# Altium PCB DanSquidControlAdapterBoard.PcbDoc
Units mil, origin at the board's own origin, x right, y up, seen from the top; angles counter-clockwise.
Board outline 2720 x 6900 mil, 4 copper layers (Top Layer, Mid-Layer 1, Mid-Layer 2, Bottom Layer), stack 56.6 mil thick; 16 components, 37 nets, 765 pads, 0 vias.
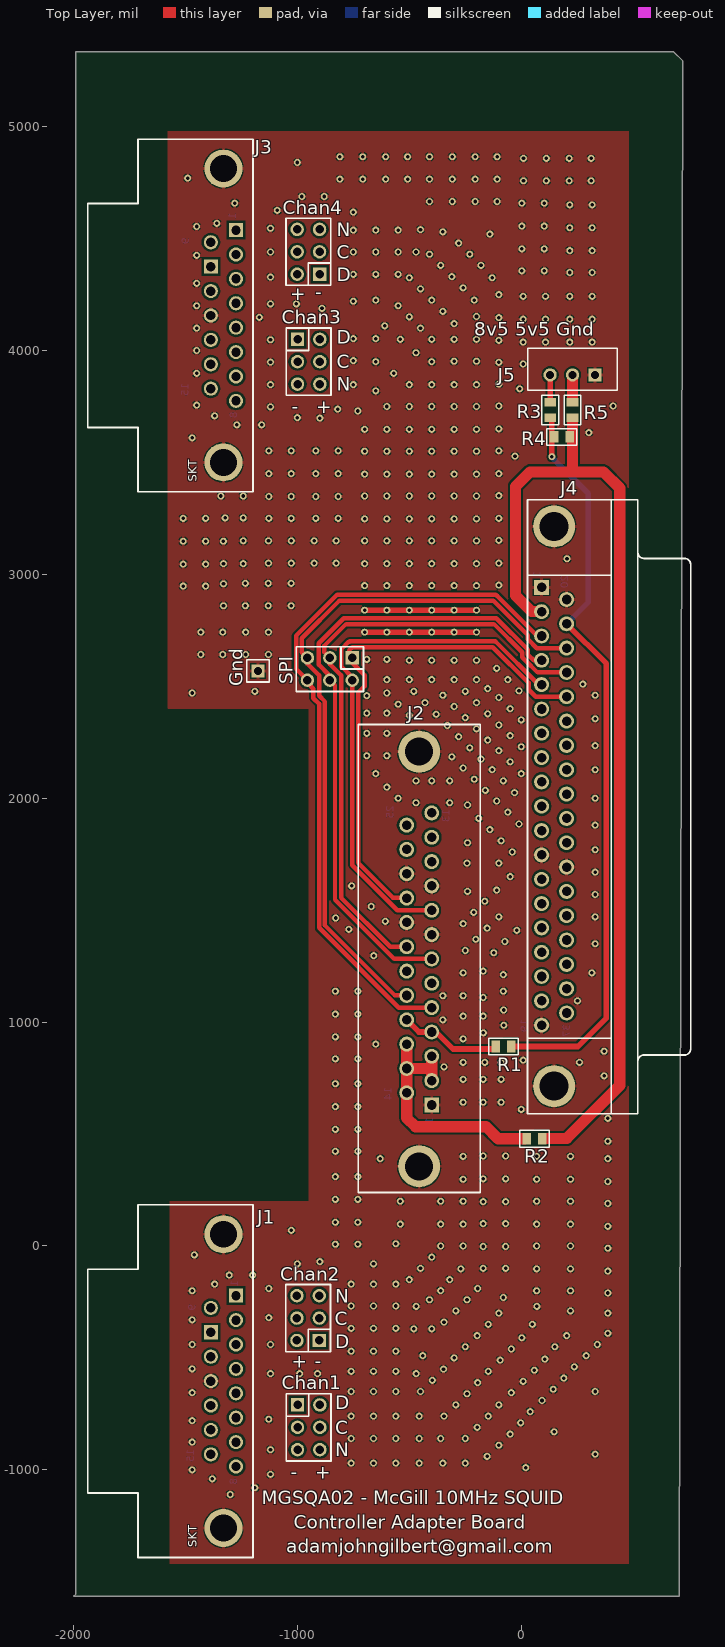
[diagram p0: Top Layer view]
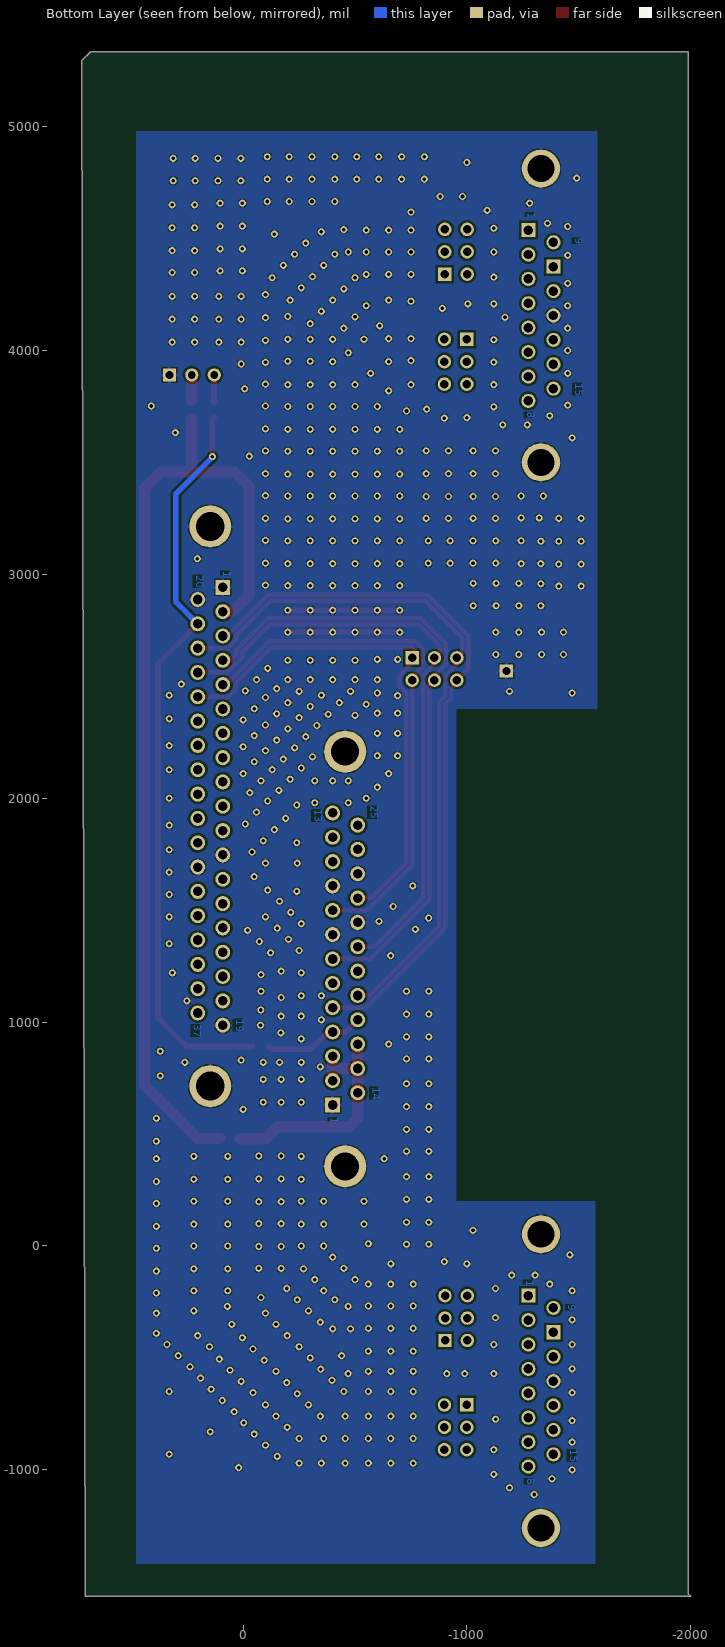
[diagram p1: Bottom Layer view, seen from below]
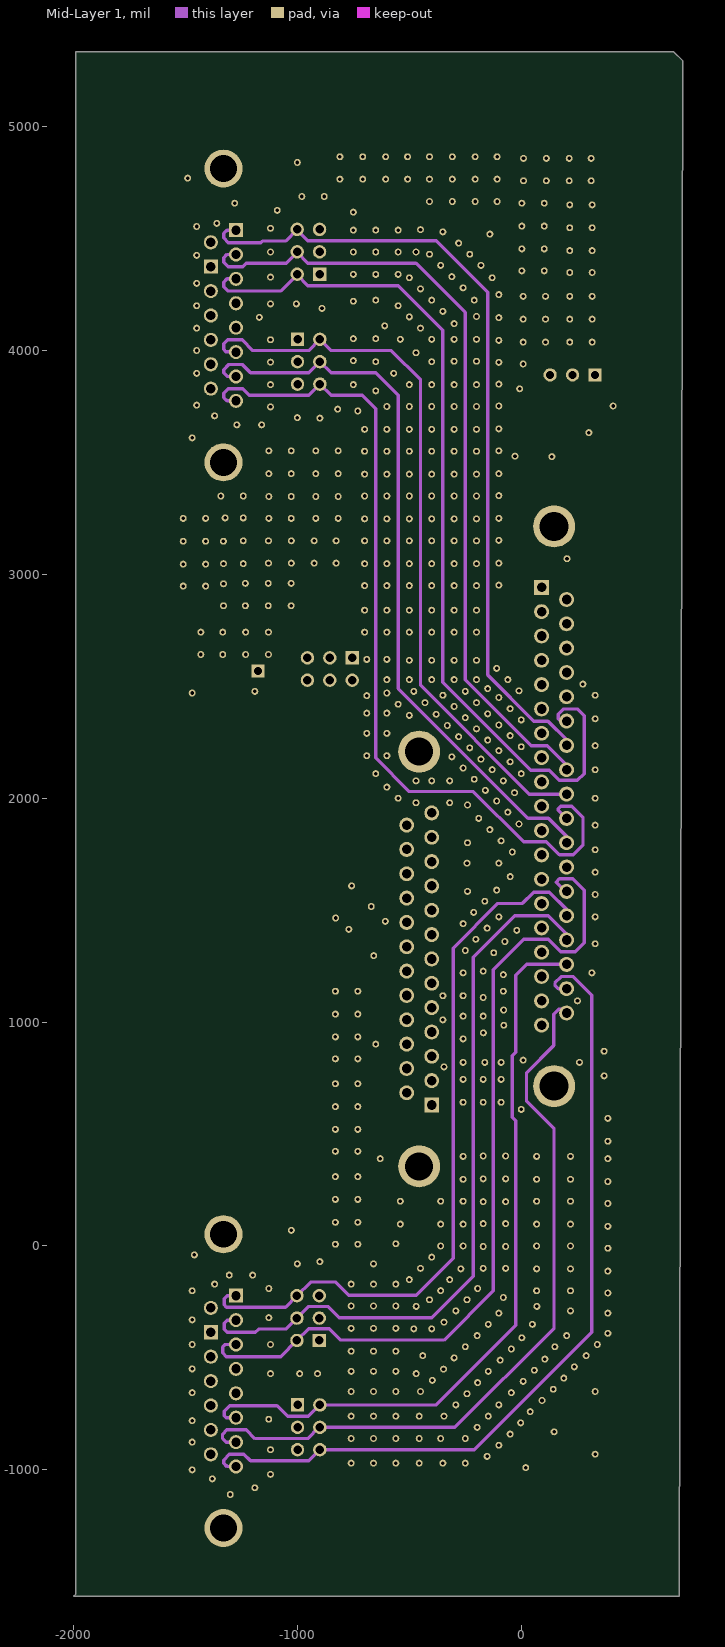
[diagram p2: Mid-Layer 1]
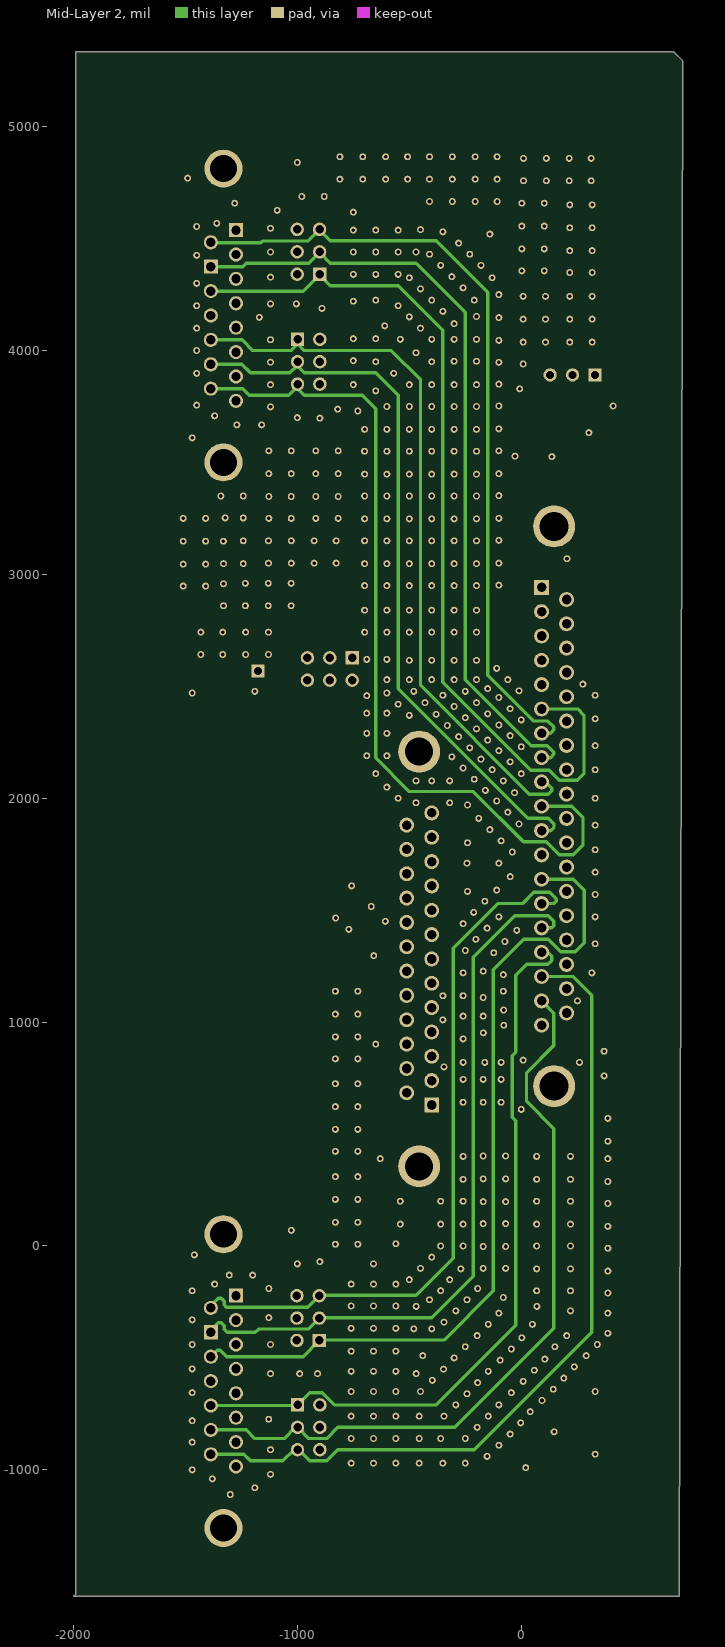
[diagram p3: Mid-Layer 2]

## Layer stack, top to bottom
Top Layer: signal copper 1.4
Dielectric: core 12, FR-4, Dk 4.8
Mid-Layer 1: signal copper 1.4
Dielectric: prepreg 27, FR-4, Dk 4.8
Mid-Layer 2: signal copper 1.4
Dielectric: core 12, FR-4, Dk 4.8
Bottom Layer: signal copper 1.4

## Board outline
705.59,-1565 -1999.41,-1565 -1989.41,-1555 -1989.41,5335 680.59,5335 720.59,5295

## Design rules (kind name [scope] priority, off if disabled: settings)
Clearance Clearance_BotText [(IsText AND OnLayer('Bottom Layer')) vs IsRegion] p1: gap=1
Clearance Clearance_0805 [HasFootprint('0805') vs IsRegion] p2: gap=15
Clearance ClearanceRegion [IsRegion] p3: gap=10
Clearance [All] p4: gap=6
DiffPairsRouting [All] p1: maxlimit=10 minlimit=6 mostfreqgap=10 toplayer_maxgap=6 toplayer_prefgap=6 midlayer1_mingap=10 midlayer2_mingap=10 bottomlayer_maxgap=6 bottomlayer_prefgap=6 maxuncoupledlength=500
HoleSize [All] p1: absolutevalues=TRUE maxlimit=200 minlimit=1 maxpercent=80.000 minpercent=20.000
PlaneClearance PlaneClearance_1 [HasFootprint('0805')] p1: clearance=30
PlaneClearance [All] p2: clearance=20
PolygonConnect [All] p1: connectstyle=Relief reliefconductorwidth=15 reliefentries=4 polygonreliefangle="90 Angle" airgapwidth=5
RoutingVias [All] p1: holewidth=28 width=50 viastyle="Through Hole" minholewidth=16 minwidth=31 maxholewidth=16 maxwidth=31
SilkToSilkClearance [All] p1: silktosilkclearance=0
SilkToSolderMaskClearance SilkscreenOverComponentPads [IsPad] p1: minsilkscreentomaskgap=0 clearancetoexposedcopper=TRUE
SolderMaskExpansion [All] p1: expansion=4
Width [All] p1: maxlimit=100 minlimit=15 preferedwidth=15
23 further rules are at their usual default settings.

## Classes and differential pairs
differential pair REG_SCLK: +REG_SCLK_P -REG_SCLK_N
differential pair NULLER4: +NULLER4_P -NULLER4_N
differential pair NULLER3: +NULLER3_P -NULLER3_N
differential pair NULLER2: +NULLER2_P -NULLER2_N
differential pair NULLER1: +NULLER1_P -NULLER1_N
differential pair MOSI: +MOSI_P -MOSI_N
differential pair DEV_SCLK_MISO: +DEV_SCLK_MISO_P -DEV_SCLK_MISO_N
differential pair DEMOD4: +DEMOD4_P -DEMOD4_N
differential pair DEMOD3: +DEMOD3_P -DEMOD3_N
differential pair DEMOD2: +DEMOD2_P -DEMOD2_N
differential pair DEMOD1: +DEMOD1_P -DEMOD1_N
differential pair CARRIER4: +CARRIER4_P -CARRIER4_N
differential pair CARRIER3: +CARRIER3_P -CARRIER3_N
differential pair CARRIER2: +CARRIER2_P -CARRIER2_N
differential pair CARRIER1: +CARRIER1_P -CARRIER1_N

## Components (designator, comment, footprint, x,y, rotation, side; value= is the part's Value field where it differs from the comment)
Chan1 "Header 2x3pin 0.1\"" HDR2X3 -999.41,-710 r270 top
Chan2 "Header 2x3pin 0.1\"" HDR2X3 -902,-422 r90 top
Chan3 "Header 2x3pin 0.1\"" HDR2X3 -999.41,4050 r270 top
Chan4 "Header 2x3pin 0.1\"" HDR2X3 -901,4341 r90 top
Gnd "Header1" HDR1 -1176,2569 r180 top (schematic designator GND)
J1 "DB15M" DSUB15-M -1274.41,-985 r90 top
J2 "DB25F" "DSUB25-F - Vertical" -400,630 r90 top
J3 "DB15M" DSUB15-M -1274.41,3775 r90 top
J4 "DB37F" DSUB37-F 520.59,2290 r270 top
J5 "WM2889" HDR1X3_MolexVertical 329,3891 r180 top
R1 "0, 0805" 0805 -44,891 r180 top
R2 "0, 0805" 0805 94,479 r180 top
R3 "0, 0805" 0805 130,3769 r270 top
R4 "DNL" 0805 216,3614 r180 top
R5 "0, 0805" 0805 229,3769 r270 top
SPI "Header 2x3pin 0.1\"" HDR2X3 -755,2627.18 r180 top

## Footprints (in the part's own frame and the unit in brackets; to place one, negate y for a bottom-side part, rotate by r counter-clockwise, add the part's x,y. Pads: shape width x height; smd on the part's side, far side on the other; paste and mask are expansions set on the pad)
0805 [mil]
  rect 38.5x52 smd: 1(0,0) 2(70,0)
  silkscreen extent -31,-38 101,38
DSUB15-M [mil]
  rect 63x63 hole 42: 1(763,0) 10(599.5,112)
  round 63 hole 42: 2(654,0) 3(545,0) 4(436,0) 5(327,0) 6(218,0) 7(109,0) 8(0,0) 9(708.5,112) 11(490.5,112) 12(381.5,112) 13(272.5,112) 14(163.5,112) 15(54.5,112)
  round 170 hole 120: 16(-274.5,56) 17(1037.5,56)
  silkscreen extent -406,-76 1169,662
"DSUB25-F - Vertical" [mm] "6225FE-ND"
  rect 1.69x1.69 hole 1.09: 1(0,0)
  round 1.69 hole 1.09: 2(2.761,0) 3(5.522,0) 4(8.283,0) 5(11.044,0) 6(13.805,0) 7(16.566,0) 8(19.327,0) 9(22.088,0) 10(24.849,0) 11(27.61,0) 12(30.371,0) 13(33.132,0) 14(1.38,2.84) 15(4.141,2.84) 16(6.903,2.84) 17(9.663,2.84) 18(12.424,2.84) 19(15.185,2.84) 20(17.946,2.84) 21(20.708,2.84) 22(23.468,2.84) 23(26.229,2.84) 24(28.99,2.84) 25(31.751,2.84)
  round 4.76 hole 3.175: 26(-6.96,1.42) 27(40.092,1.42)
  silkscreen extent -9.93,-5.5 43.17,8.33
DSUB37-F [mm] "DSUB 37Pin Female"
  rect 1.69x1.69 hole 1.09: 1(-16.566,-10.92)
  round 1.69 hole 1.09: 2(-13.806,-10.92) 3(-11.046,-10.92) 4(-8.286,-10.92) 5(-5.526,-10.92) 6(-2.766,-10.92) 7(-0.006,-10.92) 8(2.754,-10.92) 9(5.514,-10.92) 10(8.274,-10.92) 11(11.034,-10.92) 12(13.794,-10.92) 13(16.554,-10.92) 14(19.314,-10.92) 15(22.074,-10.92) 16(24.834,-10.92) 17(27.594,-10.92) 18(30.354,-10.92) 19(33.114,-10.92) 20(-15.187,-8.08) 21(-12.427,-8.08) 22(-9.667,-8.08) 23(-6.907,-8.08) 24(-4.147,-8.08) 25(-1.387,-8.08) 26(1.373,-8.08) 27(4.133,-8.08) 28(6.893,-8.08) 29(9.653,-8.08) 30(12.413,-8.08) 31(15.173,-8.08) 32(17.933,-8.08) 33(20.693,-8.08) 34(23.453,-8.08) 35(26.213,-8.08) 36(28.973,-8.08) 37(31.733,-8.08)
  round 4.76 hole 3.26: 38(-23.476,-9.5) 39(40.024,-9.5)
  silkscreen extent -26.5,-12.5 43.15,6
HDR1 [mm]
  rect 1.5x1.5 hole 0.889: 1(0,0)
  silkscreen extent -1.27,-1.27 1.27,1.27
HDR1X3_MolexVertical [mm] "WM2889"
  rect 1.5x1.5 hole 0.889: 1(0,0)
  round 1.5 hole 0.889: 2(2.54,0) 3(5.08,0)
  silkscreen extent -2.54,-3.02 7.62,1.73
HDR2X3 [mil]
  rect 60x60 hole 38: 1(0,0)
  round 60 hole 38: 2(0,100) 3(100,0) 4(100,100) 5(200,0) 6(200,100)
  silkscreen extent -50,-50 250,150

## Part data
Chan1 Chan2 Chan3 Chan4 SPI: library part Header2x3
Gnd: "TestPoint1"
J5: library part "Header 3", "Header, 0.1\"  3-Pin straight (Any equivalent - may need to be value added)"
R1 R2 R3 R4 R5: library part "RES 0805", "RES 0.0 OHM 1/8W 0805 SMD"

## Free pads (board coordinates)
  round 31 hole 16: 5(-1510,2947.91) 5(-1510,3045.83) 5(-1510,3147.91) 5(-1510,3250) 5(-1490,4770) 5(-1470,-1000) 5(-1470,-876) 5(-1470,-780) 5(-1470,-655) 5(-1470,-549) 5(-1470,-440) 5(-1470,-330) 5(-1470,-200) 5(-1470,2470) 5(-1470,3610) 5(-1460,-40) 5(-1450,3756) 5(-1450,3898) 5(-1450,4000) 5(-1450,4100) 5(-1450,4200) 5(-1450,4300) 5(-1450,4425) 5(-1450,4554) 5(-1431.3,2642.09) 5(-1431.3,2742.09) 5(-1410,2947.91) 5(-1410,3045.83) 5(-1410,3147.91) 5(-1410,3250) 5(-1380,-1040) 5(-1370,-170) 5(-1370,3708) 5(-1360,4568) 5(-1341.74,3350) 5(-1333.39,2642.09) 5(-1333.39,2742.09) 5(-1330.41,3147.91) 5(-1330.03,2860) 5(-1330,2958) 5(-1330,3047.91) 5(-1322.91,3252.09) 5(-1304.41,-130) 5(-1300,-1110) 5(-1280,4658) 5(-1270,3668) 5(-1241.74,3047.91) 5(-1241.74,3150) 5(-1241.74,3252.09) 5(-1241.74,3350) 5(-1232.11,2860) 5(-1232.11,2960) 5(-1231.3,2642.09) 5(-1231.3,2742.09) 5(-1200,-130) 5(-1190,-1080) 5(-1190,2477.18) 5(-1170,4148) 5(-1160,3668) 5(-1130.03,2860) 5(-1130.03,2960) 5(-1129.21,2642.09) 5(-1129.21,2742.09) 5(-1129.21,3050) 5(-1129.21,3150) 5(-1128,-774) 5(-1127.5,-320) 5(-1127.5,-190) 5(-1127.5,3250) 5(-1127.5,3347.91) 5(-1127.5,3450) 5(-1127.5,3552.09) 5(-1120,-1020) 5(-1120,-910) 5(-1120,-570) 5(-1120,-440) 5(-1120,3748) 5(-1120,3848) 5(-1120,3948) 5(-1120,4048) 5(-1120,4208) 5(-1120,4328) 5(-1120,4440) 5(-1120,4546) 5(-1090,4626) 5(-1027.94,2860) 5(-1027.94,2960) 5(-1027.5,3250) 5(-1027.5,3347.91) 5(-1027.5,3450) 5(-1027.5,3552.09) 5(-1027.12,70) 5(-1027.12,3050) 5(-1027.12,3150) 5(-1004.41,4208) 5(-1000,-80) 5(-1000,3700) 5(-1000,4840) 5(-990,-570) 5(-980,4688) 5(-925.04,3050) 5(-925.04,3150) 5(-917.72,3250) 5(-917.72,3347.91) 5(-917.72,3450) 5(-917.72,3552.09) 5(-910,-570) 5(-899.41,-70) 5(-899.41,3698) 5(-890,4188) 5(-880,4688) 5(-830,7.91) 5(-830,105.83) 5(-830,207.91) 5(-830,310) 5(-829.99,422.78) 5(-829.99,520.69) 5(-829.99,622.78) 5(-829.99,724.86) 5(-829.99,835.95) 5(-829.99,933.86) 5(-829.99,1035.95) 5(-829.99,1138.03) 5(-829,1465) 5(-827.12,3050) 5(-827.12,3150) 5(-820,3738) 5(-817.72,3250) 5(-817.72,3347.91) 5(-817.72,3450) 5(-817.72,3552.09) 5(-810,4765.5) 5(-810,4865.5) 5(-769.99,1414.42) 5(-760,-970) 5(-760,-860) 5(-760,-760) 5(-760,-650) 5(-760,-560) 5(-760,-470) 5(-760,-368) 5(-760,-268) 5(-760,-170) 5(-758,1608.31) 5(-750,3848) 5(-750,3955.09) 5(-750,4053) 5(-750,4220) 5(-750,4340) 5(-750,4440) 5(-750,4538) 5(-750,4618) 5(-730,7.91) 5(-730,105.83) 5(-730,207.91) 5(-730,310) 5(-730,3730) 5(-729.99,422.78) 5(-729.99,520.69) 5(-729.99,622.78) 5(-729.99,724.86) 5(-729.99,835.95) 5(-729.99,933.86) 5(-729.99,1035.95) 5(-729.99,1138.03) 5(-707.91,4765.5) 5(-707.91,4865.5) 5(-700,2742.09) 5(-700,2840) 5(-700,2950) 5(-700,3047.91) 5(-700,3150) 5(-700,3247.91) 5(-700,3350) 5(-700,3447.91) 5(-700,3550) 5(-700,3647.91) 5(-690,2190) 5(-690,2290) 5(-690,2380) 5(-690,2458.36) 5(-690,2620) 5(-669.99,1516.51) 5(-660,-970) 5(-660,-860) 5(-660,-760) 5(-660,-650) 5(-660,-560) 5(-660,-470) 5(-660,-368) 5(-660,-268) 5(-660,-170) 5(-660,-80) 5(-659,1297) 5(-650,901.75) 5(-650,2110) 5(-650,3820) 5(-650,3950) 5(-650,4053) 5(-650,4225) 5(-650,4340) 5(-650,4440) 5(-650,4538) 5(-630,390) 5(-610,4110) 5(-607,1450) 5(-605.83,4765.5) 5(-605.83,4865.5) 5(-600,2050) 5(-600,2190) 5(-600,2290) 5(-600,2380.59) 5(-600,2470) 5(-600,2530) 5(-600,2620) 5(-600,2742.09) 5(-600,2840) 5(-600,2950) 5(-600,3047.91) 5(-600,3150) 5(-600,3247.91) 5(-600,3350) 5(-600,3447.91) 5(-600,3550) 5(-600,3647.91) 5(-600,3750) 5(-570,3898) 5(-560,-970) 5(-560,-860) 5(-560,-760) 5(-560,-650) 5(-560,-560) 5(-560,-470) 5(-560,-368) 5(-560,-268) 5(-560,-170) 5(-560,10) 5(-550,2000) 5(-550,2420) 5(-550,4200) 5(-550,4340) 5(-550,4440) 5(-550,4538) 5(-540,97.91) 5(-540,200) 5(-540,4050) 5(-507.91,4765.5) 5(-507.91,4865.5) 5(-500,-150) 5(-500,2370) 5(-500,2530) 5(-500,2616.22) 5(-500,2742.09) 5(-500,2840) 5(-500,2950) 5(-500,3047.91) 5(-500,3150) 5(-500,3247.91) 5(-500,3350) 5(-500,3447.91) 5(-500,3550) 5(-500,3647.91) 5(-500,3750) 5(-500,3847.91) 5(-500,4150) 5(-500,4325) 5(-480,-370) 5(-480,2477.18) 5(-470,1980) 5(-470,2077.82) 5(-470,3990) 5(-470,4440) 5(-469.41,-570) 5(-469.41,-270) 5(-455.91,-970) 5(-455.91,-860) 5(-455.91,-760) 5(-450,-650) 5(-450,-100) 5(-450,4100) 5(-450,4275) 5(-450,4540) 5(-440,-490) 5(-430,2427.18) 5(-410,-240) 5(-410,4430) 5(-410,4665.5) 5(-410,4765.5) 5(-410,4865.5) 5(-400,-370) 5(-400,-50) 5(-400,2077.82) 5(-400,2530) 5(-400,2616.22) 5(-400,2742.09) 5(-400,2840) 5(-400,2950) 5(-400,3047.91) 5(-400,3150) 5(-400,3247.91) 5(-400,3350) 5(-400,3447.91) 5(-400,3550) 5(-400,3647.91) 5(-400,3750) 5(-400,3847.91) 5(-400,3950) 5(-400,4050) 5(-400,4225) 5(-397.18,-600) 5(-380,2375) 5(-360,-860) 5(-360,-199.41) 5(-360,0) 5(-360,97.91) 5(-360,200) 5(-360,4380) 5(-350,-970) 5(-350,1010) 5(-350,1117.91) 5(-350,2460) 5(-350,4175) 5(-350,4530) 5(-347.18,-550) 5(-345,-760) 5(-345,-340) 5(-345,800) 5(-330,2325) 5(-320,-150) 5(-320,1980) 5(-320,2077.82) 5(-310,2185) 5(-310,4330) 5(-307.91,4665.5) 5(-307.91,4765.5) 5(-307.91,4865.5) 5(-300,-500) 5(-300,2410) 5(-300,2530) 5(-300,2616.22) 5(-300,2742.09) 5(-300,2840) 5(-300,2950) 5(-300,3047.91) 5(-300,3150) 5(-300,3247.91) 5(-300,3350) 5(-300,3447.91) 5(-300,3550) 5(-300,3647.91) 5(-300,3750) 5(-300,3847.91) 5(-300,3952.09) 5(-300,4050) 5(-300,4120) 5(-292.18,-710) 5(-292.18,-290) 5(-280,2275) 5(-280,4480) 5(-270,-102.09) 5(-260,0) 5(-260,97.91) 5(-260,200) 5(-260,297.91) 5(-260,400) 5(-260,642.09) 5(-260,744.17) 5(-260,820) 5(-260,925.08) 5(-260,1027.17) 5(-260,1117.91) 5(-260,1220) 5(-260,1440) 5(-260,2135) 5(-260,4280) 5(-250,-970) 5(-250,-860) 5(-250,-450) 5(-250,1320) 5(-250,2360) 5(-250,2477.18) 5(-242.18,-660) 5(-242.18,-240) 5(-242.18,1710) 5(-240,1583.98) 5(-240,1801.3) 5(-240,1970) 5(-230,2225) 5(-230,4430) 5(-212.82,1490) 5(-210,2085) 5(-210,4225) 5(-205.83,4665.5) 5(-205.83,4765.5) 5(-205.83,4865.5) 5(-202.82,1370) 5(-200,2310) 5(-200,2427.18) 5(-200,2530) 5(-200,2616.22) 5(-200,2742.09) 5(-200,2840) 5(-200,2950) 5(-200,3047.91) 5(-200,3150) 5(-200,3247.91) 5(-200,3350) 5(-200,3447.91) 5(-200,3550) 5(-200,3647.91) 5(-200,3750) 5(-200,3847.91) 5(-200,3952.09) 5(-200,4050) 5(-200,4152.09) 5(-197.18,-810) 5(-197.18,-400) 5(-195,-610) 5(-195,-190) 5(-190,1910) 5(-180,2175) 5(-180,4380) 5(-170,-100) 5(-170,-2.09) 5(-170,100) 5(-170,197.91) 5(-170,300) 5(-170,402.09) 5(-170,642.09) 5(-170,744.17) 5(-170,1027.17) 5(-170,1110) 5(-170,1227.85) 5(-169,952) 5(-162.82,820) 5(-162.82,1540) 5(-160,2035) 5(-152.82,-940) 5(-152.82,1420) 5(-150,2260) 5(-150,2377.18) 5(-150,2490) 5(-147.18,-760) 5(-147.18,-560) 5(-147.18,-350) 5(-140,1860) 5(-140,4520) 5(-130,2127.82) 5(-130,4325) 5(-122.82,1310) 5(-110,1590) 5(-110,1987.82) 5(-110,2580) 5(-107.91,4665.5) 5(-107.91,4765.5) 5(-107.91,4865.5) 5(-100,-890) 5(-100,-710) 5(-100,-300) 5(-100,1470) 5(-100,1710) 5(-100,2212.82) 5(-100,2327.18) 5(-100,2450) 5(-100,2952.09) 5(-100,3050) 5(-100,3152.09) 5(-100,3250) 5(-100,3352.09) 5(-100,3450) 5(-100,3552.09) 5(-100,3650) 5(-100,3752.09) 5(-100,3850) 5(-100,3947.09) 5(-100,4045) 5(-100,4147.09) 5(-100,4250) 5(-94.36,-510) 5(-90,642.09) 5(-90,744.17) 5(-90,820) 5(-90,1810) 5(-80,-230) 5(-80,1138.03) 5(-80,1212.09) 5(-80,2077.82) 5(-79,1054) 5(-78,986) 5(-72.82,1360) 5(-70,-100) 5(-70,-2.09) 5(-70,100) 5(-70,197.91) 5(-70,300) 5(-70,402.09) 5(-60,1937.82) 5(-60,2530) 5(-50,-840) 5(-50,2162.82) 5(-50,2280) 5(-50,2400) 5(-49.41,1650) 5(-44.36,-655) 5(-44.36,-460) 5(-40,1760) 5(-30,2025) 5(-28,3528) 5(-20,1410) 5(-10,1885) 5(-10,2480) 5(-7,3829) 5(-2.82,-790) 5(0,610) 5(0,2110) 5(0,2230) 5(0,2350) 5(2.82,-410) 5(2.82,4355.91) 5(2.82,4453.83) 5(2.82,4555.91) 5(2.82,4658) 5(8.46,-605) 5(8.46,830) 5(8.46,3939.91) 5(8.46,4037.83) 5(8.46,4139.91) 5(8.46,4242) 5(10,4758.19) 5(10,4858.19) 5(20,-990) 5(40,-740) 5(50,-350) 5(58.46,-555) 5(68.46,-200) 5(68.46,-102.09) 5(68.46,0) 5(68.46,97.91) 5(68.46,200) 5(68.46,297.91) 5(68.46,400) 5(70,-270) 5(92.82,-690) 5(102.82,4355.91) 5(102.82,4453.83) 5(102.82,4555.91) 5(102.82,4658) 5(105.64,-505) 5(108.46,4037.83) 5(108.46,4139.91) 5(108.46,4242) 5(112.09,4758.19) 5(112.09,4858.19) 5(137,3526) 5(142.82,-640) 5(146.57,-830) 5(150,-450) 5(190,-590) 5(202.82,-400) 5(204.24,3070) 5(214.17,4758.19) 5(214.17,4858.19) 5(216.7,4037.83) 5(216.7,4139.91) 5(216.7,4242) 5(216.7,4348.41) 5(216.7,4446.33) 5(216.7,4548.41) 5(216.7,4650.5) 5(220,-290) 5(220,-200) 5(220,-102.09) 5(220,0) 5(220,97.91) 5(220,200) 5(220,297.91) 5(220,400) 5(237,-540) 5(251.1,1094.96) 5(260,820) 5(275.59,2510) 5(289.82,-490) 5(302.15,3633.13) 5(312.09,4758.19) 5(312.09,4858.19) 5(315.59,1220) 5(316.7,4037.83) 5(316.7,4139.91) 5(316.7,4242) 5(316.7,4348.41) 5(316.7,4446.33) 5(316.7,4548.41) 5(316.7,4650.5) 5(330,-930) 5(330,-650) 5(330,1350) 5(330,1470) 5(330,1570) 5(330,1670) 5(330,1770) 5(330,1880) 5(330,2000) 5(330,2127.28) 5(330,2235) 5(330,2355) 5(330,2460) 5(339.82,-440) 5(370,760) 5(370,870) 5(387,-390) 5(387,-300) 5(387,-210) 5(387,-112.09) 5(387,-10) 5(387,87.91) 5(387,190) 5(387,287.91) 5(387,390) 5(387,467.91) 5(387,570) 5(410,3752.09)

## Nets (pads, with @x,y where several pads share a name; then routed paths per layer and width w, separated by ;. In a path a pad name is that pad's centre, name@x,y a point inside that pad or via, vN(x,y) a via of type N, cw(c..) or ccw(c..) an arc to the next point about the centre after c; other vN are vias at no path point)
5V5: J4.2 R2.1 R4.1 R5.2 | length 4485.2
  Top Layer w50: J4.2 46.46,2833.54 -26,2906 -26,3393 39,3458 229,3458 R5.2@229,3691 ; R2.1@102.82,480 203,480 440,717 440,3385 367,3458 237,3458
8V5: J4.21 pad.5@137,3526 R1.1 R3.2 R4.2 | length 3343.9
  Top Layer w25: R1.1 253,891 380,1018 380,2601.73 J4.21 ; R3.2 137,3692 pad.5@137,3526
  Bottom Layer w25: pad.5@133.5,3526.5 300,3360 300,2876.77 J4.21
CARRIER1_N: Chan1.3 J1.14 J4.18 | length 3370.3
  Mid-Layer 2 w15: J1.14 -1227.91,-821.5 -1189.41,-860 -1059.41,-860 Chan1.3@-1009.41,-810 ; Chan1.3 -949.41,-860 -869.41,-860 -819.41,-810 -296.41,-810 145.9,-367.69 145.9,524.1 23.58,646.42 23.58,773.58 145.59,895.59 145.59,1040.12 90.71,1095 J4.18
CARRIER1_P: Chan1.4 J1.7 J4.37 | length 3372.1
  Mid-Layer 1 w15: J1.7 -1318.41,-876 -1334.41,-860 -1334.41,-840 -1315.91,-821.5 -1227.91,-821.5 -1189.41,-860 -954.41,-860 -904.41,-810 Chan1.4 -296.41,-810 146.57,-367.02 146.57,523.43 23.58,646.42 23.58,773.58 145.59,895.59 145.59,1035 168.15,1057.56 185.59,1057.56 J4.37
CARRIER2_N: Chan2.3 J1.10 J4.15 | length 3276.8
  Mid-Layer 2 w15: J1.10 -1386.41,-375.41 -1354,-343 -1340,-343 -1327,-356 -1327,-372 -1313,-386 -1188,-386 -1173,-371 -951,-371 Chan2.3 -900,-320 -400,-320 -214.41,-134.41 -214.41,1290 -29.41,1475 120.83,1475 145.9,1449.92 145.9,1431.26 135.59,1420.94 J4.15
CARRIER2_P: Chan2.4 J1.2 J4.34 | length 3327.6
  Mid-Layer 1 w15: J1.2 -1313,-331 -1326.91,-344.91 -1326.91,-372 -1312.91,-386 -1188,-386 -1173,-371 -1051,-371 Chan2.4 -950,-270 -864,-270 -814,-320 -400,-320 -214.41,-134.41 -214.41,1290 -29.41,1475 120.59,1475 202.48,1393.11 J4.34
CARRIER3_N: Chan3.3 J3.14 J4.11 | length 3288.1
  Mid-Layer 2 w15: J3.14 -1247.91,3938.5 -1209.41,3900 -1034.41,3900 -999.41,3935 Chan3.3 -999.41,3930 -969.41,3900 -650.5,3900 -550,3799.5 -550,2490 30.04,1909.96 120.63,1909.96 146.57,1884.02 146.57,1871.34 130.83,1855.59 J4.11
CARRIER3_P: Chan3.4 J3.7 J4.30 | length 3327.8
  Mid-Layer 1 w15: J3.7 -1313.41,3884 -1329.41,3900 -1329.41,3915 -1306.91,3937.5 -1246.91,3937.5 -1209.41,3900 -949.41,3900 Chan3.4 -849.41,3900 -650,3900 -550,3800 -550,2490 30.04,1909.96 121.65,1909.96 202.48,1829.14 J4.30
CARRIER4_N: Chan4.3 J3.10 J4.8 | length 3513.6
  Mid-Layer 2 w15: J3.10 -1243.91,4374.5 -1228.41,4390 -949,4390 -901,4438 -853,4390 -470,4390 -250,4170 -250,2530 45,2235 115.59,2235 145.59,2205 145.59,2196.34 130.83,2181.57 J4.8
CARRIER4_P: Chan4.4 J3.2 J4.27 | length 3577.9
  Mid-Layer 1 w15: J3.2 -1314.41,4429 -1329.41,4414 -1329.41,4394 -1309.41,4374 -1244,4374 -1228,4390 -1049,4390 -1001,4438 -953,4390 -470,4390 -250,4170 -250,2530 45,2235 115.59,2235 202.48,2148.11 J4.27
DEMOD1_N: Chan1.1 J1.13 J4.16 | length 3392.6
  Mid-Layer 2 w15: J1.13 -1001.91,-712.5 Chan1.1 -944.41,-655 -889.41,-655 -834.41,-710 -379.41,-710 -24.41,-355 -24.41,560.05 -40,575.64 -40,849.41 -24.41,865 -24.41,1210 23.58,1257.99 118.58,1257.99 135.59,1275 135.59,1295 118.31,1312.28 J4.16
DEMOD1_P: Chan1.2 J1.6 J4.35 | length 3401.8
  Mid-Layer 1 w15: J1.6 -1317.41,-767 -1326.91,-757.5 -1326.91,-737.5 -1302.41,-713 -1091,-713 -1043,-761 -950.41,-761 Chan1.2 -379.41,-710 -24.41,-355 -24.41,560.05 -40,575.64 -40,849.41 -24.41,865 -24.41,1210 23.58,1257.99 J4.35
DEMOD2_N: Chan2.1 J1.11 J4.13 | length 3787
  Mid-Layer 2 w15: J1.11 -1357.91,-466 -1344,-466 -1316,-494 -974,-494 Chan2.1 -900,-420 -345,-420 -124.41,-199.41 -124.41,1235 10.59,1370 120.59,1370 175.59,1315 240.59,1315 280.59,1355 280.59,1590 232.32,1638.27 J4.13
DEMOD2_P: Chan2.2 J1.3 J4.32 | length 3855.7
  Mid-Layer 1 w15: J1.3 -1323,-440 -1334,-451 -1334,-477 -1317,-494 -1074,-494 Chan2.2 -950,-370 -857,-370 -807,-420 -345,-420 -124.41,-199.41 -124.41,1235 10.59,1370 120.59,1370 175.59,1315 240.59,1315 280.59,1355 280.59,1590 230.59,1640 170.59,1640 155.59,1625 196.61,1583.98 J4.32
DEMOD3_N: Chan3.1 J3.13 J4.9 | length 3280.9
  Mid-Layer 2 w15: J3.13 -1246.91,4047.5 -1199.41,4000 -1029.41,4000 Chan3.1@-999.41,4030 ; Chan3.1 Chan3.1@-999.41,4030 ; J4.9 107.68,2072.91 135.59,2045 135.59,2033.62 120.59,2018.62 36.42,2018.62 -450,2505.04 -450,3870 -580,4000 -969.41,4000 Chan3.1@-999.41,4030
DEMOD3_P: Chan3.2 J3.6 J4.28 | length 3305.5
  Mid-Layer 1 w15: J3.6 -1276.41,3995 -1319.41,3995 -1329.41,4005 -1329.41,4030 -1311.91,4047.5 -1246.91,4047.5 -1199.41,4000 -949.41,4000 Chan3.2 -849.41,4000 -580,4000 -450,3870 -450,2505.04 36.42,2018.62 J4.28
DEMOD4_N: Chan4.1 J3.11 J4.6 | length 4026.6
  Mid-Layer 2 w15: J3.11 -973.5,4265.5 -901,4338 -853,4290 -550,4290 -350,4090 -350,2518 43,2125 125.59,2125 170.07,2080.52 251.1,2080.52 280,2109.41 280,2370.59 251.69,2398.9 J4.6
DEMOD4_P: Chan4.2 J3.3 J4.25 | length 4054.9
  Mid-Layer 1 w15: J3.3 -1314.41,4320 -1329.41,4305 -1329.41,4285 -1310.41,4266 -1073,4266 -1001,4338 -953,4290 -550,4290 -350,4090 -350,2517.82 42.82,2125 125.59,2125 170.07,2080.52 251.1,2080.52 280.59,2110 280.59,2369.41 251.1,2398.9 189.49,2398.9 165.59,2375 165.59,2355 175.98,2344.61 J4.25
DEV_SCLK_MISO_N: J2.9 J4.5 SPI.2 | length 2412
  Top Layer w20: J2.9 -553.38,1499.61 -755,1701.23 SPI.2 -755,2540.18 -803,2588.18 -803,2667 -770,2700 -766.77,2700 -765.77,2701 -116.23,2701 -115.23,2700 -114.64,2700 77.8,2507.56 J4.5
DEV_SCLK_MISO_P: J2.22 J4.24 SPI.1 | length 2327.6
  Top Layer w20: SPI.1@-767.82,2652.18 -767.82,2662.18 -755,2675 -127,2675 33,2515 33,2485.06 64.8,2453.27 J4.24 ; SPI.1 -755,2605 -700,2550 -700,2500 -729,2471 -729,1712 -573,1556 -513.86,1556 J2.22
GND: Gnd.1 J1.12 J1.16 J1.17 J2.1 J2.8 J2.10 J2.21 J2.23 J2.26 J2.27 J3.12 J3.16 J3.17 J4.1 J4.12 J4.19 J4.20 J4.31 J4.38 J4.39 J5.1 pad.5@0,610 pad.5@0,2110 pad.5@0,2230 pad.5@0,2350 pad.5@2.82,4355.91 pad.5@2.82,4453.83 pad.5@2.82,4555.91 pad.5@2.82,4658 pad.5@2.82,-410 pad.5@8.46,830 pad.5@8.46,3939.91 pad.5@8.46,4037.83 pad.5@8.46,4139.91 pad.5@8.46,4242 pad.5@8.46,-605 pad.5@10,4758.19 pad.5@10,4858.19 pad.5@20,-990 pad.5@40,-740 pad.5@50,-350 pad.5@58.46,-555 pad.5@68.46,0 pad.5@68.46,97.91 pad.5@68.46,200 pad.5@68.46,297.91 pad.5@68.46,400 pad.5@68.46,-102.09 pad.5@68.46,-200 pad.5@70,-270 pad.5@92.82,-690 pad.5@102.82,4355.91 pad.5@102.82,4453.83 pad.5@102.82,4555.91 pad.5@102.82,4658 pad.5@105.64,-505 pad.5@108.46,4037.83 pad.5@108.46,4139.91 pad.5@108.46,4242 pad.5@112.09,4758.19 pad.5@112.09,4858.19 pad.5@142.82,-640 pad.5@146.57,-830 pad.5@150,-450 pad.5@190,-590 pad.5@202.82,-400 pad.5@204.24,3070 pad.5@214.17,4758.19 pad.5@214.17,4858.19 pad.5@216.7,4037.83 pad.5@216.7,4139.91 pad.5@216.7,4242 pad.5@216.7,4348.41 pad.5@216.7,4446.33 pad.5@216.7,4548.41 pad.5@216.7,4650.5 pad.5@220,0 pad.5@220,97.91 pad.5@220,200 pad.5@220,297.91 pad.5@220,400 pad.5@220,-102.09 pad.5@220,-200 pad.5@220,-290 pad.5@237,-540 pad.5@251.1,1094.96 pad.5@260,820 pad.5@275.59,2510 pad.5@289.82,-490 pad.5@302.15,3633.13 pad.5@312.09,4758.19 pad.5@312.09,4858.19 pad.5@315.59,1220 pad.5@316.7,4037.83 pad.5@316.7,4139.91 pad.5@316.7,4242 pad.5@316.7,4348.41 pad.5@316.7,4446.33 pad.5@316.7,4548.41 pad.5@316.7,4650.5 pad.5@330,1350 pad.5@330,1470 pad.5@330,1570 pad.5@330,1670 pad.5@330,1770 pad.5@330,1880 pad.5@330,2000 pad.5@330,2127.28 pad.5@330,2235 pad.5@330,2355 pad.5@330,2460 pad.5@330,-650 pad.5@330,-930 pad.5@339.82,-440 pad.5@370,760 pad.5@370,870 pad.5@387,87.91 pad.5@387,190 pad.5@387,287.91 pad.5@387,390 pad.5@387,467.91 pad.5@387,570 pad.5@387,-10 pad.5@387,-112.09 pad.5@387,-210 pad.5@387,-300 pad.5@387,-390 pad.5@410,3752.09 pad.5@-2.82,-790 pad.5@-7,3829 pad.5@-10,1885 pad.5@-10,2480 pad.5@-20,1410 pad.5@-28,3528 pad.5@-30,2025 pad.5@-40,1760 pad.5@-44.36,-460 pad.5@-44.36,-655 pad.5@-49.41,1650 pad.5@-50,2162.82 pad.5@-50,2280 pad.5@-50,2400 pad.5@-50,-840 pad.5@-60,1937.82 pad.5@-60,2530 pad.5@-70,100 pad.5@-70,197.91 pad.5@-70,300 pad.5@-70,402.09 pad.5@-70,-2.09 pad.5@-70,-100 pad.5@-72.82,1360 pad.5@-78,986 pad.5@-79,1054 pad.5@-80,1138.03 pad.5@-80,1212.09 pad.5@-80,2077.82 pad.5@-80,-230 pad.5@-90,642.09 pad.5@-90,744.17 pad.5@-90,820 pad.5@-90,1810 pad.5@-94.36,-510 pad.5@-100,1470 pad.5@-100,1710 pad.5@-100,2212.82 pad.5@-100,2327.18 pad.5@-100,2450 pad.5@-100,2952.09 pad.5@-100,3050 pad.5@-100,3152.09 pad.5@-100,3250 pad.5@-100,3352.09 pad.5@-100,3450 pad.5@-100,3552.09 pad.5@-100,3650 pad.5@-100,3752.09 pad.5@-100,3850 pad.5@-100,3947.09 pad.5@-100,4045 pad.5@-100,4147.09 pad.5@-100,4250 pad.5@-100,-300 pad.5@-100,-710 pad.5@-100,-890 pad.5@-107.91,4665.5 pad.5@-107.91,4765.5 pad.5@-107.91,4865.5 pad.5@-110,1590 pad.5@-110,1987.82 pad.5@-110,2580 pad.5@-122.82,1310 pad.5@-130,2127.82 pad.5@-130,4325 pad.5@-140,1860 pad.5@-140,4520 pad.5@-147.18,-350 pad.5@-147.18,-560 pad.5@-147.18,-760 pad.5@-150,2260 pad.5@-150,2377.18 pad.5@-150,2490 pad.5@-152.82,1420 pad.5@-152.82,-940 pad.5@-160,2035 pad.5@-162.82,820 pad.5@-162.82,1540 pad.5@-169,952 pad.5@-170,100 pad.5@-170,197.91 pad.5@-170,300 pad.5@-170,402.09 pad.5@-170,642.09 pad.5@-170,744.17 pad.5@-170,1027.17 pad.5@-170,1110 pad.5@-170,1227.85 pad.5@-170,-2.09 pad.5@-170,-100 pad.5@-180,2175 pad.5@-180,4380 pad.5@-190,1910 pad.5@-195,-190 pad.5@-195,-610 pad.5@-197.18,-400 pad.5@-197.18,-810 pad.5@-200,2310 pad.5@-200,2427.18 pad.5@-200,2530 pad.5@-200,2616.22 pad.5@-200,2742.09 pad.5@-200,2840 pad.5@-200,2950 pad.5@-200,3047.91 pad.5@-200,3150 pad.5@-200,3247.91 pad.5@-200,3350 pad.5@-200,3447.91 pad.5@-200,3550 pad.5@-200,3647.91 pad.5@-200,3750 pad.5@-200,3847.91 pad.5@-200,3952.09 pad.5@-200,4050 pad.5@-200,4152.09 pad.5@-202.82,1370 pad.5@-205.83,4665.5 pad.5@-205.83,4765.5 pad.5@-205.83,4865.5 pad.5@-210,2085 pad.5@-210,4225 pad.5@-212.82,1490 pad.5@-230,2225 pad.5@-230,4430 pad.5@-240,1583.98 pad.5@-240,1801.3 pad.5@-240,1970 pad.5@-242.18,1710 pad.5@-242.18,-240 pad.5@-242.18,-660 pad.5@-250,1320 pad.5@-250,2360 pad.5@-250,2477.18 pad.5@-250,-450 pad.5@-250,-860 pad.5@-250,-970 pad.5@-260,0 pad.5@-260,97.91 pad.5@-260,200 pad.5@-260,297.91 pad.5@-260,400 pad.5@-260,642.09 pad.5@-260,744.17 pad.5@-260,820 pad.5@-260,925.08 pad.5@-260,1027.17 pad.5@-260,1117.91 pad.5@-260,1220 pad.5@-260,1440 pad.5@-260,2135 pad.5@-260,4280 pad.5@-270,-102.09 pad.5@-280,2275 pad.5@-280,4480 pad.5@-292.18,-290 pad.5@-292.18,-710 pad.5@-300,2410 pad.5@-300,2530 pad.5@-300,2616.22 pad.5@-300,2742.09 pad.5@-300,2840 pad.5@-300,2950 pad.5@-300,3047.91 pad.5@-300,3150 pad.5@-300,3247.91 pad.5@-300,3350 pad.5@-300,3447.91 pad.5@-300,3550 pad.5@-300,3647.91 pad.5@-300,3750 pad.5@-300,3847.91 pad.5@-300,3952.09 pad.5@-300,4050 pad.5@-300,4120 pad.5@-300,-500 pad.5@-307.91,4665.5 pad.5@-307.91,4765.5 pad.5@-307.91,4865.5 pad.5@-310,2185 pad.5@-310,4330 pad.5@-320,1980 pad.5@-320,2077.82 pad.5@-320,-150 pad.5@-330,2325 pad.5@-345,800 pad.5@-345,-340 pad.5@-345,-760 pad.5@-347.18,-550 pad.5@-350,1010 pad.5@-350,1117.91 pad.5@-350,2460 pad.5@-350,4175 pad.5@-350,4530 pad.5@-350,-970 pad.5@-360,0 pad.5@-360,97.91 pad.5@-360,200 pad.5@-360,4380 pad.5@-360,-199.41 pad.5@-360,-860 pad.5@-380,2375 pad.5@-397.18,-600 pad.5@-400,2077.82 pad.5@-400,2530 pad.5@-400,2616.22 pad.5@-400,2742.09 pad.5@-400,2840 pad.5@-400,2950 pad.5@-400,3047.91 pad.5@-400,3150 pad.5@-400,3247.91 pad.5@-400,3350 pad.5@-400,3447.91 pad.5@-400,3550 pad.5@-400,3647.91 pad.5@-400,3750 pad.5@-400,3847.91 pad.5@-400,3950 pad.5@-400,4050 pad.5@-400,4225 pad.5@-400,-50 pad.5@-400,-370 pad.5@-410,4430 pad.5@-410,4665.5 pad.5@-410,4765.5 pad.5@-410,4865.5 pad.5@-410,-240 pad.5@-430,2427.18 pad.5@-440,-490 pad.5@-450,4100 pad.5@-450,4275 pad.5@-450,4540 pad.5@-450,-100 pad.5@-450,-650 pad.5@-455.91,-760 pad.5@-455.91,-860 pad.5@-455.91,-970 pad.5@-469.41,-270 pad.5@-469.41,-570 pad.5@-470,1980 pad.5@-470,2077.82 pad.5@-470,3990 pad.5@-470,4440 pad.5@-480,2477.18 pad.5@-480,-370 pad.5@-500,2370 pad.5@-500,2530 pad.5@-500,2616.22 pad.5@-500,2742.09 pad.5@-500,2840 pad.5@-500,2950 pad.5@-500,3047.91 pad.5@-500,3150 pad.5@-500,3247.91 pad.5@-500,3350 pad.5@-500,3447.91 pad.5@-500,3550 pad.5@-500,3647.91 pad.5@-500,3750 pad.5@-500,3847.91 pad.5@-500,4150 pad.5@-500,4325 pad.5@-500,-150 pad.5@-507.91,4765.5 pad.5@-507.91,4865.5 pad.5@-540,97.91 pad.5@-540,200 pad.5@-540,4050 pad.5@-550,2000 pad.5@-550,2420 pad.5@-550,4200 pad.5@-550,4340 pad.5@-550,4440 pad.5@-550,4538 pad.5@-560,10 pad.5@-560,-170 pad.5@-560,-268 pad.5@-560,-368 pad.5@-560,-470 pad.5@-560,-560 pad.5@-560,-650 pad.5@-560,-760 pad.5@-560,-860 pad.5@-560,-970 pad.5@-570,3898 pad.5@-600,2050 pad.5@-600,2190 pad.5@-600,2290 pad.5@-600,2380.59 pad.5@-600,2470 pad.5@-600,2530 pad.5@-600,2620 pad.5@-600,2742.09 pad.5@-600,2840 pad.5@-600,2950 pad.5@-600,3047.91 pad.5@-600,3150 pad.5@-600,3247.91 pad.5@-600,3350 pad.5@-600,3447.91 pad.5@-600,3550 pad.5@-600,3647.91 pad.5@-600,3750 pad.5@-605.83,4765.5 pad.5@-605.83,4865.5 pad.5@-607,1450 pad.5@-610,4110 pad.5@-630,390 pad.5@-650,901.75 pad.5@-650,2110 pad.5@-650,3820 pad.5@-650,3950 pad.5@-650,4053 pad.5@-650,4225 pad.5@-650,4340 pad.5@-650,4440 pad.5@-650,4538 pad.5@-659,1297 pad.5@-660,-80 pad.5@-660,-170 pad.5@-660,-268 pad.5@-660,-368 pad.5@-660,-470 pad.5@-660,-560 pad.5@-660,-650 pad.5@-660,-760 pad.5@-660,-860 pad.5@-660,-970 pad.5@-669.99,1516.51 pad.5@-690,2190 pad.5@-690,2290 pad.5@-690,2380 pad.5@-690,2458.36 pad.5@-690,2620 pad.5@-700,2742.09 pad.5@-700,2840 pad.5@-700,2950 pad.5@-700,3047.91 pad.5@-700,3150 pad.5@-700,3247.91 pad.5@-700,3350 pad.5@-700,3447.91 pad.5@-700,3550 pad.5@-700,3647.91 pad.5@-707.91,4765.5 pad.5@-707.91,4865.5 pad.5@-729.99,422.78 pad.5@-729.99,520.69 pad.5@-729.99,622.78 pad.5@-729.99,724.86 pad.5@-729.99,835.95 pad.5@-729.99,933.86 pad.5@-729.99,1035.95 pad.5@-729.99,1138.03 pad.5@-730,7.91 pad.5@-730,105.83 pad.5@-730,207.91 pad.5@-730,310 pad.5@-730,3730 pad.5@-750,3848 pad.5@-750,3955.09 pad.5@-750,4053 pad.5@-750,4220 pad.5@-750,4340 pad.5@-750,4440 pad.5@-750,4538 pad.5@-750,4618 pad.5@-758,1608.31 pad.5@-760,-170 pad.5@-760,-268 pad.5@-760,-368 pad.5@-760,-470 pad.5@-760,-560 pad.5@-760,-650 pad.5@-760,-760 pad.5@-760,-860 pad.5@-760,-970 pad.5@-769.99,1414.42 pad.5@-810,4765.5 pad.5@-810,4865.5 pad.5@-817.72,3250 pad.5@-817.72,3347.91 pad.5@-817.72,3450 pad.5@-817.72,3552.09 pad.5@-820,3738 pad.5@-827.12,3050 pad.5@-827.12,3150 pad.5@-829,1465 pad.5@-829.99,422.78 pad.5@-829.99,520.69 pad.5@-829.99,622.78 pad.5@-829.99,724.86 pad.5@-829.99,835.95 pad.5@-829.99,933.86 pad.5@-829.99,1035.95 pad.5@-829.99,1138.03 pad.5@-830,7.91 pad.5@-830,105.83 pad.5@-830,207.91 pad.5@-830,310 pad.5@-880,4688 pad.5@-890,4188 pad.5@-899.41,3698 pad.5@-899.41,-70 pad.5@-910,-570 pad.5@-917.72,3250 pad.5@-917.72,3347.91 pad.5@-917.72,3450 pad.5@-917.72,3552.09 pad.5@-925.04,3050 pad.5@-925.04,3150 pad.5@-980,4688 pad.5@-990,-570 pad.5@-1000,3700 pad.5@-1000,4840 pad.5@-1000,-80 pad.5@-1004.41,4208 pad.5@-1027.5,3250 pad.5@-1027.5,3347.91 pad.5@-1027.5,3450 pad.5@-1027.5,3552.09 pad.5@-1027.12,70 pad.5@-1027.12,3050 pad.5@-1027.12,3150 pad.5@-1027.94,2860 pad.5@-1027.94,2960 pad.5@-1090,4626 pad.5@-1120,3748 pad.5@-1120,3848 pad.5@-1120,3948 pad.5@-1120,4048 pad.5@-1120,4208 pad.5@-1120,4328 pad.5@-1120,4440 pad.5@-1120,4546 pad.5@-1120,-440 pad.5@-1120,-570 pad.5@-1120,-910 pad.5@-1120,-1020 pad.5@-1127.5,3250 pad.5@-1127.5,3347.91 pad.5@-1127.5,3450 pad.5@-1127.5,3552.09 pad.5@-1127.5,-190 pad.5@-1127.5,-320 pad.5@-1128,-774 pad.5@-1129.21,2642.09 pad.5@-1129.21,2742.09 pad.5@-1129.21,3050 pad.5@-1129.21,3150 pad.5@-1130.03,2860 pad.5@-1130.03,2960 pad.5@-1160,3668 pad.5@-1170,4148 pad.5@-1190,2477.18 pad.5@-1190,-1080 pad.5@-1200,-130 pad.5@-1231.3,2642.09 pad.5@-1231.3,2742.09 pad.5@-1232.11,2860 pad.5@-1232.11,2960 pad.5@-1241.74,3047.91 pad.5@-1241.74,3150 pad.5@-1241.74,3252.09 pad.5@-1241.74,3350 pad.5@-1270,3668 pad.5@-1280,4658 pad.5@-1300,-1110 pad.5@-1304.41,-130 pad.5@-1322.91,3252.09 pad.5@-1330,2958 pad.5@-1330,3047.91 pad.5@-1330.03,2860 pad.5@-1330.41,3147.91 pad.5@-1333.39,2642.09 pad.5@-1333.39,2742.09 pad.5@-1341.74,3350 pad.5@-1360,4568 pad.5@-1370,3708 pad.5@-1370,-170 pad.5@-1380,-1040 pad.5@-1410,2947.91 pad.5@-1410,3045.83 pad.5@-1410,3147.91 pad.5@-1410,3250 pad.5@-1431.3,2642.09 pad.5@-1431.3,2742.09 pad.5@-1450,3756 pad.5@-1450,3898 pad.5@-1450,4000 pad.5@-1450,4100 pad.5@-1450,4200 pad.5@-1450,4300 pad.5@-1450,4425 pad.5@-1450,4554 pad.5@-1460,-40 pad.5@-1470,2470 pad.5@-1470,3610 pad.5@-1470,-200 pad.5@-1470,-330 pad.5@-1470,-440 pad.5@-1470,-549 pad.5@-1470,-655 pad.5@-1470,-780 pad.5@-1470,-876 pad.5@-1470,-1000 pad.5@-1490,4770 pad.5@-1510,2947.91 pad.5@-1510,3045.83 pad.5@-1510,3147.91 pad.5@-1510,3250 | length 1000
  Top Layer w25: pad.5@-700,2742.09 -600,2742.09 -500,2742.09 -400,2742.09 -300,2742.09 pad.5@-200,2742.09 ; pad.5@-700,2840 -600,2840 -500,2840 -400,2840 -300,2840 pad.5@-200,2840
MOSI_N: J2.7 J4.4 SPI.4 | length 2851.3
  Top Layer w20: J2.7 -567.97,1282.2 -832,1546.23 -832,2504.18 SPI.4 -855,2547.18 -905,2597.18 -905,2692.77 -793.52,2804.25 -111.25,2804.25 30,2663 30,2640 31.41,2640 55.19,2616.22 J4.4
MOSI_P: J2.20 J4.23 SPI.3 | length 2765.2
  Top Layer w20: J2.20 -585.55,1336.55 -804.99,1555.99 -804.99,2549.58 -855,2599.59 SPI.3 -879,2651.18 -879,2682 -782.75,2778.25 -122.02,2778.25 4,2652.23 4,2629.23 19.23,2614 20.64,2614 72.72,2561.93 J4.23
NetJ2_2: J2.2 J2.3 J2.14 J2.15 J2.16 R2.2 | length 1115.7
  Top Layer w50: J2.16 J2.15 ; J2.2 -400,793.05 ; J2.3 -400,793.05 ; R2.2@15,479 -103,479 -157,533 -473,533 -511.81,571.81 J2.14 J2.15 ; J2.15 -400,793.05
NetJ2_4: J2.4 J2.17 R1.2 | length 456.4
  Top Layer w25: J2.17 -457.46,956.1 -380.51,956.1 -304.41,880 -125,880 R1.2
NetJ5_2: J5.2 R5.1 | length 113
  Top Layer w50: R5.1@229,3778 J5.2
NetJ5_3: J5.3 R3.1 | length 122.4
  Top Layer w25: J5.3 130,3890 R3.1
NULLER1_N: Chan1.5 J1.15 J4.17 | length 3758.4
  Mid-Layer 2 w15: J1.15 -1238.91,-930.5 -1209.41,-960 -1064.41,-960 -1014.41,-910 Chan1.5 -994.41,-910 -944.41,-960 -869.41,-960 -819.41,-910 -209.41,-910 315.59,-385 315.59,1120 231.97,1203.62 J4.17
NULLER1_P: Chan1.6 J1.8 J4.36 | length 3766
  Mid-Layer 1 w15: J1.8 -1314.41,-985 -1329.41,-970 -1329.41,-956 -1303.91,-930.5 -1238.91,-930.5 -1209.41,-960 -949.41,-960 Chan1.6 -209.41,-910 315.59,-385 315.59,1120 231.97,1203.62 179.21,1203.62 150.59,1175 150.59,1165 166.26,1149.33 J4.36
NULLER2_N: Chan2.5 J1.9 J4.14 | length 3258.4
  Mid-Layer 2 w15: J1.9 -1386.41,-266.41 -1354,-234 -1340,-234 -1327,-247 -1327,-263 -1317,-273 -953,-273 Chan2.5 ; Chan2.5@-900,-220 -470,-220 -304.41,-54.41 -304.41,1330 -104.8,1529.61 5.59,1529.61 55.59,1579.61 126.22,1579.61 155.59,1550.24 155.59,1539.92 145.59,1529.92 145.59,1529.61 J4.14
NULLER2_P: Chan2.6 J1.1 J4.33 | length 3306.3
  Mid-Layer 1 w15: J1.1 -1313,-222 -1326.91,-235.91 -1326.91,-263 -1316.91,-273 -1053,-273 Chan2.6 -941,-161 -829,-161 -770,-220 -469.41,-220 -304.41,-55 -304.41,1330 -104.41,1530 5.59,1530 55.59,1580 125.59,1580 202.48,1503.11 J4.33
NULLER3_N: Chan3.5 J3.15 J4.10 | length 3845.5
  Mid-Layer 2 w15: J3.15 -1243.91,3829.5 -1214.41,3800 -1039.41,3800 -999.41,3840 Chan3.5 -999.41,3830 -969.41,3800 -710,3800 -650,3740 -650,2180 -500,2030 -215,2030 10,1805 112,1805 170.07,1746.93 232.32,1746.93 275.59,1790.2 275.59,1915 226.34,1964.25 J4.10
NULLER3_P: Chan3.6 J3.8 J4.29 | length 3849.1
  Mid-Layer 1 w15: J3.8 -1314.41,3775 -1329.41,3790 -1329.41,3810 -1309.41,3830 -1244.41,3830 -1214.41,3800 -949.41,3800 Chan3.6 -849.41,3800 -710,3800 -650,3740 -650,2180 -500,2030 -214.41,2030 10.59,1805 112.52,1805 170.59,1746.93 232.52,1746.93 275.59,1790 275.59,1915 226.34,1964.25 176.34,1964.25 165.59,1953.5 165.59,1946.85 J4.29
NULLER4_N: Chan4.5 J3.9 J4.7 | length 3555.6
  Mid-Layer 2 w15: J3.9 -1384.91,4482 -1163,4482 -1156,4489 -953,4489 Chan4.5 -901,4538 -853,4490 -380,4490 -150,4260 -150,2550 55,2345 119.09,2345 145.59,2318.5 145.59,2305 130.83,2290.24 J4.7
NULLER4_P: Chan4.6 J3.1 J4.26 | length 3616.2
  Mid-Layer 1 w15: J3.1 -1314.41,4538 -1329.41,4523 -1329.41,4503 -1308.41,4482 -1163,4482 -1156,4489 -1053,4489 Chan4.6 ; Chan4.6@-1001,4538 -953,4490 -380,4490 -150,4260 -150,2550.59 55.98,2344.61 119.48,2344.61 202.48,2261.61 J4.26
REG_SCLK_N: J2.5 J4.3 SPI.6 | length 3246.8
  Top Layer w20: J2.5 -546.8,1064.8 -903,1421 -903,2421.23 -929,2447.23 -929,2489.59 -955,2515.59 SPI.6 -1006,2578.18 -1006,2725.77 -822.77,2909 -114.32,2909 -110.32,2905 -108,2905 72.12,2724.88 J4.3
REG_SCLK_P: J2.18 J4.22 SPI.5 | length 3167.7
  Top Layer w20: -980,2652.18 SPI.5 -955,2600.59 -903,2548.59 -903,2458 -877,2432 -877,1431.77 -564.38,1119.15 J2.18 ; -980,2655.59 -980,2715 -812,2883 -125.09,2883 30,2727.91 30,2710 69.41,2670.59 J4.22
pads on no net: J1.4 J1.5 J2.6 J2.11 J2.12 J2.13 J2.19 J2.24 J2.25 J3.4 J3.5

## Polygon pours and split planes (outlines as drawn)
GND on Top Layer "Top Layer-No Net" (solid, pour order 12): 480,-1420 480,4980 -1580,4980 -1580,2398.9 -950,2400 -950,200 -1570,200 -1570,-1420
GND on Bottom Layer "Top Layer-No Net" (solid, pour order 14): 477.45,-1420 477.45,4980 -1582.55,4980 -1582.55,2398.9 -952.55,2400 -952.55,200 -1572.55,200 -1572.55,-1420
no net on Mechanical 1 "Top Layer-No Net" (none): 480,-1420 480,4980 -1580,4980 -1580,2400 -950,2400 -950,200 -1570,200 -1570,-1420

## Silkscreen, mask and mechanical layers (free items; w line width, h text height)
Top Overlay:
  text "N" at -825,4510 h60
  text "C" at -825,4410 h60
  text "D" at -825,4310 h60
  text "-" at -920,4231 h60
  text "+" at -1031,4224 h60
  text "8v5 5v5 Gnd" at -210,4066 h60
  text "D" at -825,4030 h60
  text "C" at -825,3920 h60
  text "N" at -825,3820 h60
  text "-" at -1025,3720 h60
  text "+" at -915,3720 h60
  text "N" at -831,-254 h60
  text "C" at -834,-355 h60
  text "D" at -830,-456 h60
  text "+" at -1026,-544 h60
  text "-" at -922,-544 h60
  text "D" at -830,-730 h60
  text "C" at -830,-840 h60
  text "N" at -830,-940 h60
  text "-" at -1030,-1040 h60
  text "+" at -920,-1040 h60
  text "MGSQA02 - McGill 10MHz SQUID" at -1160,-1153 h60
  text "Controller Adapter Board" at -1017,-1262 h60
  text "adamjohngilbert@gmail.com" at -1050,-1370 h60

## Text inside footprints (layer, text, board x,y; h text height)
J1: Top Overlay "SKT" at -1449.29,-1345.67 h37.5 r90; Bottom Layer "1" at -1251,-152 h60 r90; Bottom Layer "15" at -1448,-909 h60 r90; Bottom Layer "8" at -1256,-1038 h60 r90; Bottom Layer "9" at -1440.21,-260.38 h60 r90
J2: Bottom Layer "25" at -557,1966 h60 r90; Bottom Layer "14" at -565,710 h60 r90; Bottom Layer "13" at -306,1950 h60 r90; Bottom Layer "1" at -379,575 h60 r90
J3: Top Overlay "SKT" at -1449.29,3414.33 h37.5 r90; Bottom Layer "15" at -1471,3854 h60 r90; Bottom Layer "9" at -1470.26,4502.64 h60 r90; Bottom Layer "1" at -1259,4616 h60 r90; Bottom Layer "8" at -1256,3726 h60 r90
J4: Bottom Layer "37" at 233,990 h60 r90; Bottom Layer "20" at 223,2997 h60 r90; Bottom Layer "19" at 44,1013 h60 r90; Bottom Layer "1" at 101,3015 h60 r90